# EAGLE board FY (EAGLE 9.6.2)
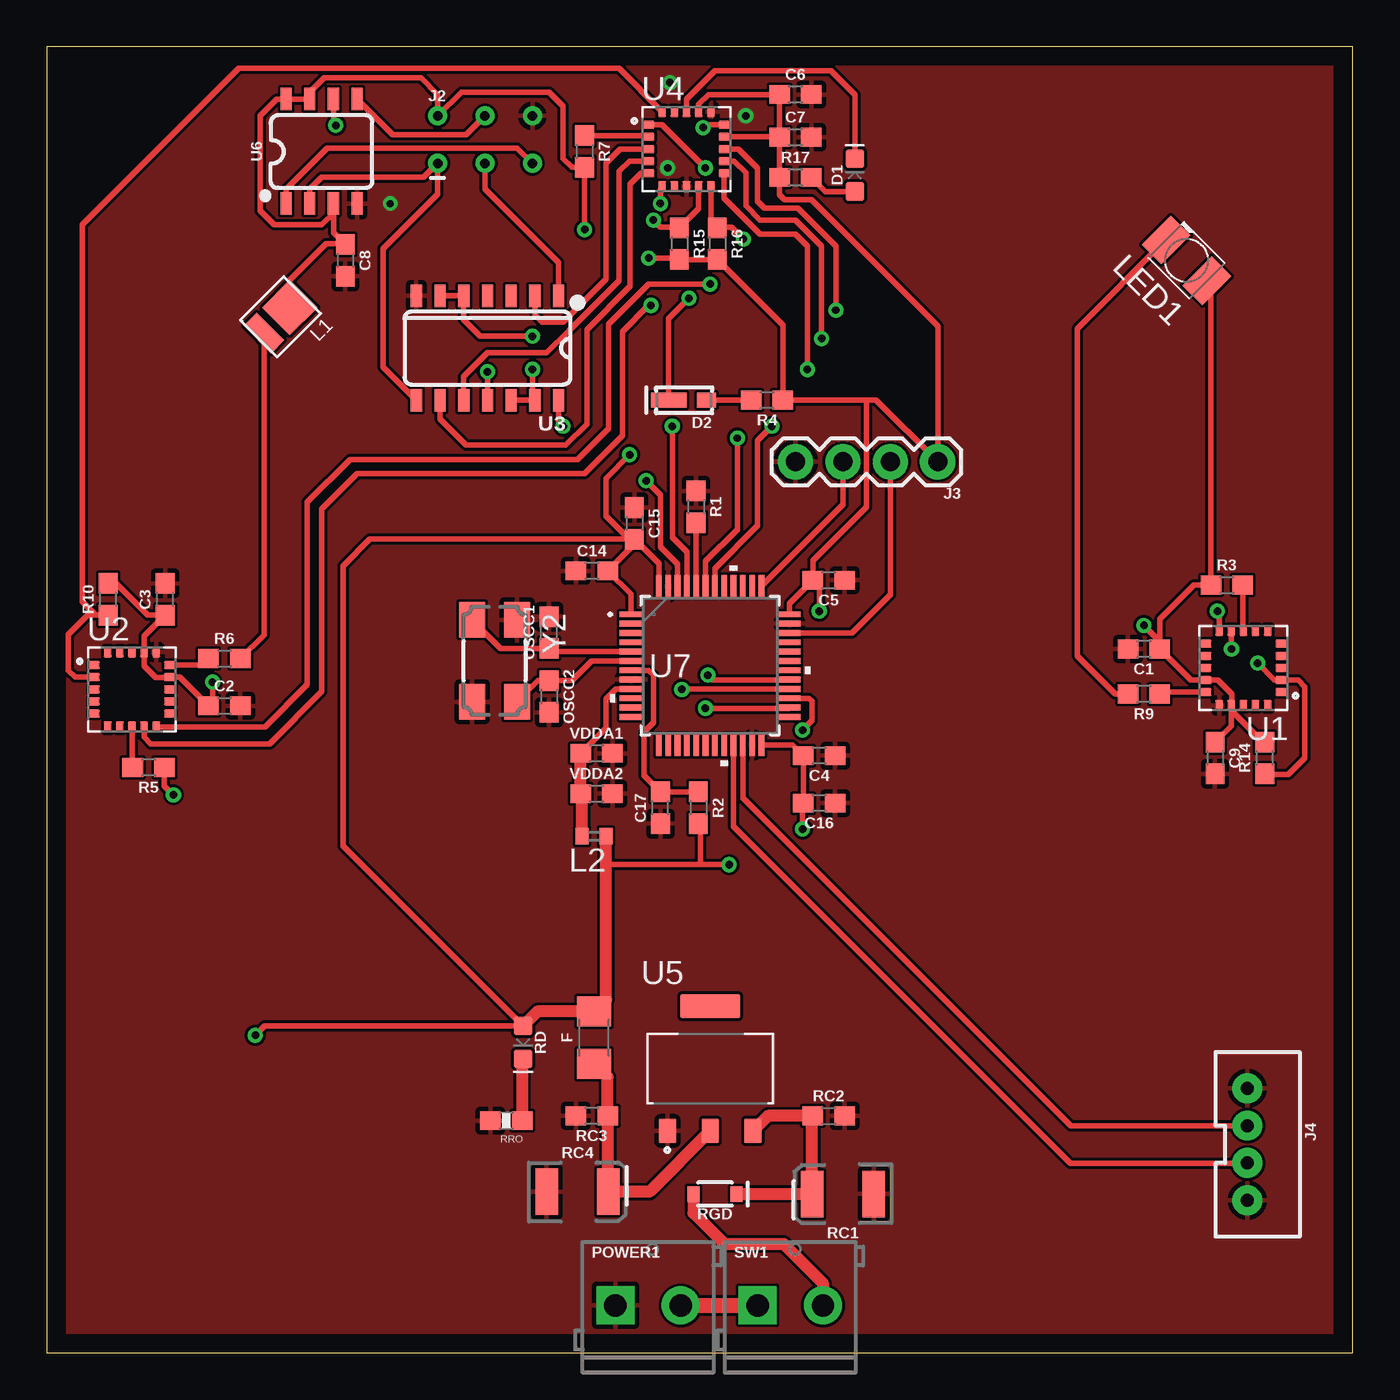
[diagram p0: board, top side]
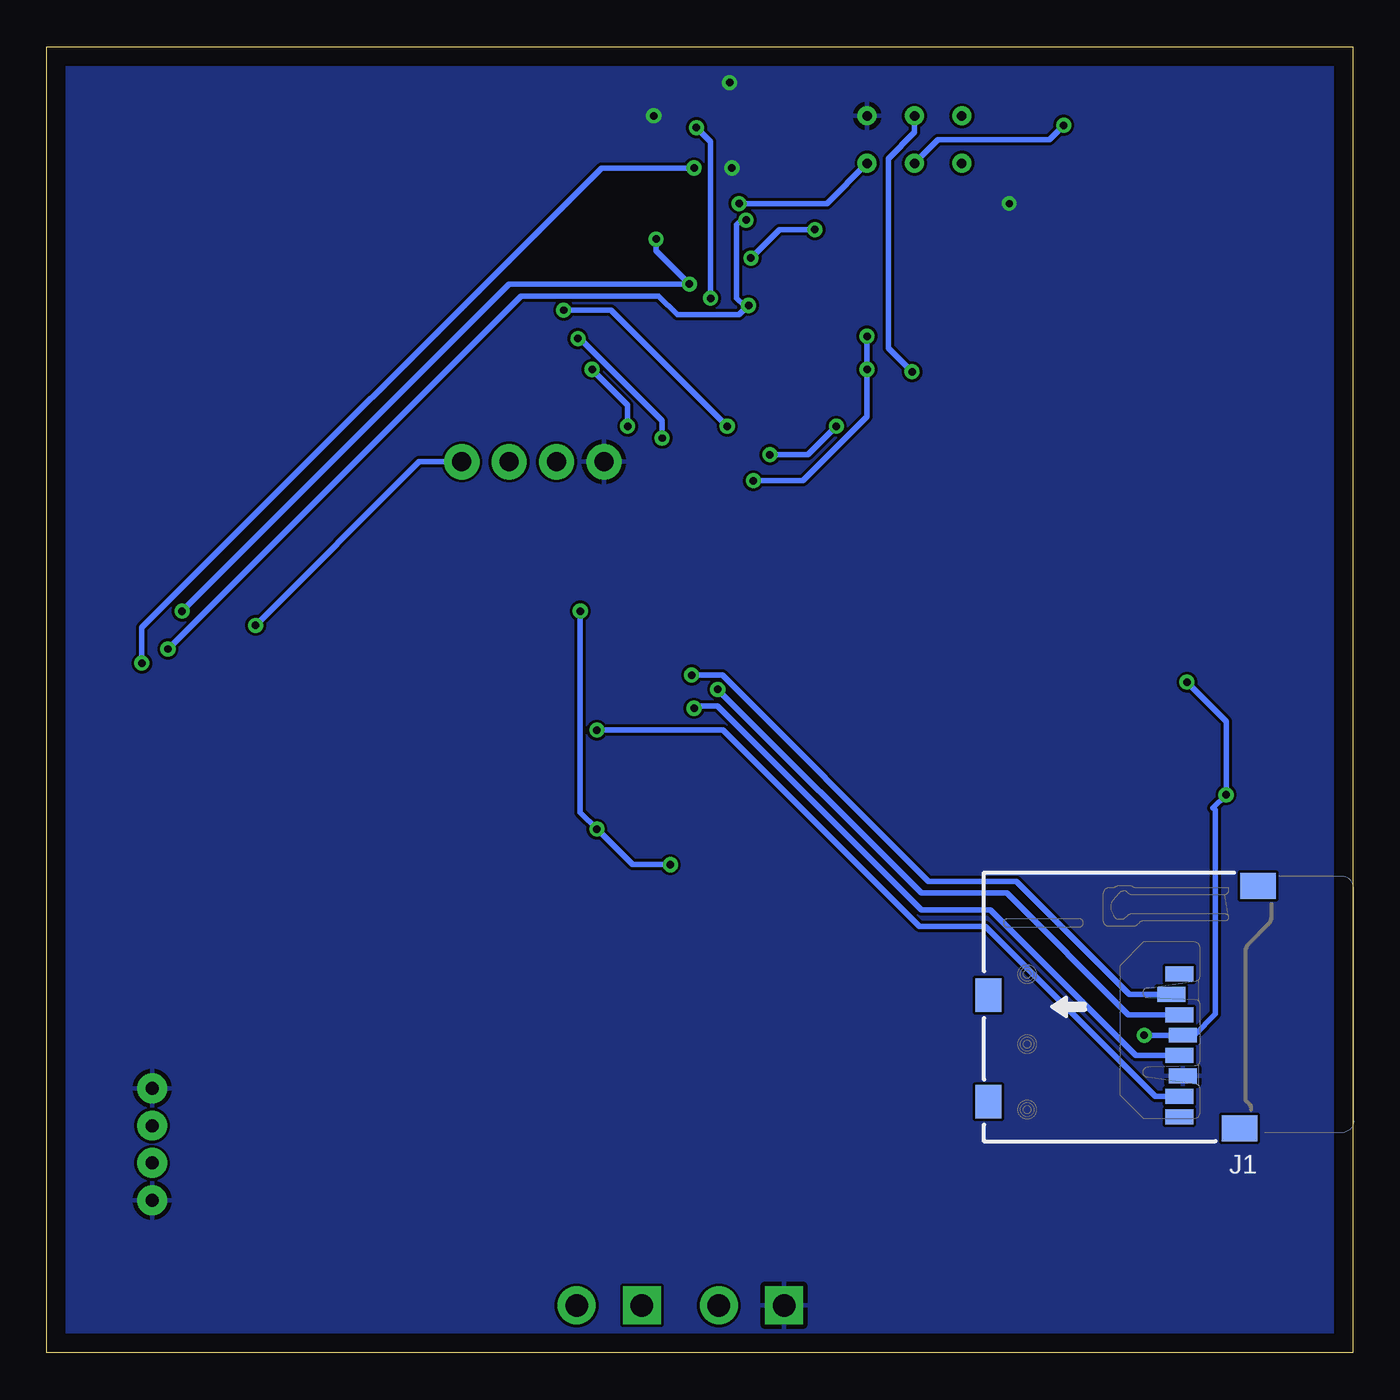
[diagram p1: board, bottom side, seen from below]

Size 70 x 70 mm. Coordinates in mm from the lower left corner, seen from the top.
Outline: 0,0 70,0 70,70 0,70 0,0
Copper layers (1*16): Top 0.035mm / dielectric 1.5mm / Bottom 0.035mm
Design rules "default": minimum track width 6mil, minimum drill 0.35mm, track to track 6mil, track to pad 6mil, pad to pad 6mil, via to via 6mil, smd to smd 6mil, copper to edge 40mil, drill to drill 6mil, minimum pad ring 10mil, minimum via ring 8mil, stop-mask expansion 4mil, vias tented up to drill 0mil, thermal gap 10mil
Net classes: 1 Power: width 0.305 mm

## Footprints (pad centres in the part's own frame; a part is rotated, then mirrored left to right if it is on the bottom)
0603 = smd 1.1 x 1: 1 -0.85,0; 2 0.85,0
LED-0603 = smd 1 x 1: A -0.877,0; C 0.877,0
SUPER_BRIGHT_SMD_LED_3014 = smd 1 x 0.8: A -1.2,0 | smd 1.9 x 0.8: C 0.827,0
1206 = smd 1.6 x 1.8: 1 -1.4,0; 2 1.4,0
CON-SD-CARD_2908-05 = smd 0.8 x 1.5: 1 1.761,3.847; 2 0.669,4.253; 3 -0.423,3.847; 4 -1.515,3.644; 5 -2.607,3.847; 6 -3.7,3.644; 7 -4.792,3.847; 8 -5.884,3.847 | smd 1.397 x 1.905: GND@1 -6.5,0.6; GND@2 6.473,-0.389 | smd 1.803 x 1.397: GND@3 0.631,14.059; GND@4 -5.084,14.059
2X3_TEST_POINTS = drill 0.508: 1 -2.54,-1.27; 2 -2.54,1.27; 3 0,-1.27; 4 0,1.27; 5 2.54,-1.27; 6 2.54,1.27
1X04 = drill 1.016 pad 1.88: 1 0,0; 2 2.54,0; 3 5.08,0; 4 7.62,0
JST-4-PTH-VERT = drill 0.7 pad 1.6: 1 -3,-0.55; 2 -1,-0.55; 3 1,-0.55; 4 3,-0.55
150283DS73103 = smd 2.1 x 2.1: 1 -1.95,-0.05 | smd 1 x 2.1: 2 -0.004,-0.06
0402 = smd 0.7 x 0.9: 1 -0.65,0; 2 0.65,0
KA-3528ASYC = smd 1.5 x 2.2: A -1.55,0; C 1.55,0
SCREWTERMINAL-3.5MM-2-NS = drill 1.2 pad 2.032 square: 1 0,0 | drill 1.2 pad 2.032: 2 3.5,0
EIA3528 = smd 1.2 x 2.5: A 1.65,0; C -1.65,0
SOD-323 = smd 0.63 x 0.83: A 1.15,0; C -1.15,0
0603-RES = smd 1.1 x 1: 1 -0.85,0; 2 0.85,0
PQFN65P470X450X270-20N = smd 0.59 x 0.43: 1 -2.01,1.3; 2 -2.01,0.65; 3 -2.01,0; 4 -2.01,-0.65; 5 -2.01,-1.3; 11 2.01,-1.3; 12 2.01,-0.65; 13 2.01,0; 14 2.01,0.65; 15 2.01,1.3 | smd 0.43 x 0.59: 6 -1.3,-2.01; 7 -0.65,-2.01; 8 0,-2.01; 9 0.65,-2.01; 10 1.3,-2.01; 16 1.3,2.01; 17 0.65,2.01; 18 0,2.01; 19 -0.65,2.01; 20 -1.3,2.01
SO14 = smd 0.6 x 1.2: 1 -3.175,-2.8; 2 -1.905,-2.8; 3 -0.635,-2.8; 4 0.635,-2.8; 5 1.905,-2.8; 6 3.175,-2.8; 7 4.445,-2.8; 8 4.445,2.8; 9 3.175,2.8; 10 1.905,2.8; 11 0.635,2.8; 12 -0.635,2.8; 13 -1.905,2.8; 14 -3.175,2.8
SOT229P700X180-4N = smd 0.93 x 1.31: 1 -2.29,-3.345; 2 0,-3.345; 3 2.29,-3.345 | smd 3.24 x 1.31: 4 0,3.345
SO08 = smd 0.6 x 1.2: 1 -1.905,-2.8; 2 -0.635,-2.8; 3 0.635,-2.8; 4 1.905,-2.8; 5 1.905,2.8; 6 0.635,2.8; 7 -0.635,2.8; 8 -1.905,2.8
LQFP48-7X7MM = smd 1.194 x 0.305: 1 -4.25,2.75; 2 -4.25,2.25; 3 -4.25,1.75; 4 -4.25,1.25; 5 -4.25,0.75; 6 -4.25,0.25; 7 -4.25,-0.25; 8 -4.25,-0.75; 9 -4.25,-1.25; 10 -4.25,-1.75; 11 -4.25,-2.25; 12 -4.25,-2.75; 25 4.25,-2.75; 26 4.25,-2.25; 27 4.25,-1.75; 28 4.25,-1.25; 29 4.25,-0.75; 30 4.25,-0.25; 31 4.25,0.25; 32 4.25,0.75; 33 4.25,1.25; 34 4.25,1.75; 35 4.25,2.25; 36 4.25,2.75 | smd 0.305 x 1.194: 13 -2.75,-4.25; 14 -2.25,-4.25; 15 -1.75,-4.25; 16 -1.25,-4.25; 17 -0.75,-4.25; 18 -0.25,-4.25; 19 0.25,-4.25; 20 0.75,-4.25; 21 1.25,-4.25; 22 1.75,-4.25; 23 2.25,-4.25; 24 2.75,-4.25; 37 2.75,4.25; 38 2.25,4.25; 39 1.75,4.25; 40 1.25,4.25; 41 0.75,4.25; 42 0.25,4.25; 43 -0.25,4.25; 44 -0.75,4.25; 45 -1.25,4.25; 46 -1.75,4.25; 47 -2.25,4.25; 48 -2.75,4.25
OSCCC500X320X110-4N = smd 1.9 x 1.4: 1 -2.2,-1.2; 2 2.2,-1.2; 3 2.2,1.2; 4 -2.2,1.2

## Placement (x,y rotation side)
C1  1uF  [0603]  58.8,37.72 180 top
C2  1uF  [0603]  9.53,34.67 0 top
C3  100nF  [0603]  6.35,40.39 90 top
C4  100nF  [0603]  41.4,32 180 top
C5  100nF  [0603]  41.91,41.4 180 top
C6  1uF  [0603]  40.13,67.44 0 top
C7  100nF  [0603]  40.13,65.15 0 top
C8  1.0uF  [0603]  16,58.55 270 top
C9  100nF  [0603]  62.61,31.88 270 top
C14  100nF  [0603]  29.21,41.91 0 top
C15  100nF  [0603]  31.5,44.45 270 top
C16  4.7uF  [0603]  41.4,29.46 180 top
C17  0.1uF  [0603]  32.89,29.21 90 top
D1  GREEN  [LED-0603]  43.31,63.12 90 top
D2  5700k  [SUPER_BRIGHT_SMD_LED_3014]  34.16,51.05 180 top
F  0.75A  [1206]  29.34,16.89 90 top
J1  CON-SD-CARD_MICROSD-2908-05  [CON-SD-CARD_2908-05]  5.46,18.54 90 bottom
J2  Flash Programming  [2X3_TEST_POINTS]  23.5,65.02 0 top
J3  [1X04]  47.75,47.75 180 top
J4  [JST-4-PTH-VERT]  64.9,11.18 270 top
L1  150283DS73103  [150283DS73103]  11.68,54.61 225 top
L2  BLM15HB221SN1  [0402]  29.34,27.69 180 top
LED1  [KA-3528ASYC]  61.09,58.55 135 top
OSCC1  25pF  [0603]  26.92,38.61 90 top
OSCC2  25pF  [0603]  26.92,35.18 270 top
POWER1  [SCREWTERMINAL-3.5MM-2-NS]  30.48,2.54 0 top
R1  10k  [0603]  34.8,45.34 270 top
R2  10k  [0603]  34.92,29.21 270 top
R3  10k  [0603]  63.25,41.15 0 top
R4  200  [0603]  38.61,51.05 180 top
R5  10k  [0603]  5.46,31.37 180 top
R6  200  [0603]  9.53,37.21 0 top
R7  10k  [0603]  28.83,64.39 270 top
R9  200  [0603]  58.8,35.31 180 top
R10  10k  [0603]  3.3,40.39 90 top
R14  10k  [0603]  65.28,31.88 90 top
R15  10k  [0603]  33.91,59.44 270 top
R16  10k  [0603]  35.94,59.44 270 top
R17  330  [0603]  40.13,62.99 0 top
RC1  22uF  [EIA3528]  42.67,8.51 180 top
RC2  100nF  [0603]  41.91,12.7 0 top
RC3  100nF  [0603]  29.21,12.7 180 top
RC4  22uF  [EIA3528]  28.45,8.64 0 top
RD  Red  [LED-0603]  25.53,16.64 270 top
RGD  1A/23V  [SOD-323]  35.81,8.51 180 top
RRO  1.5k  [0603-RES]  24.64,12.45 180 top
SW1  [SCREWTERMINAL-3.5MM-2-NS]  38.1,2.54 0 top
U1  AS72652-BLGT  [PQFN65P470X450X270-20N]  64.14,36.7 180 top
U2  AS72653-BLGT  [PQFN65P470X450X270-20N]  4.57,35.56 0 top
U3  74LVC4066  [SO14]  24.26,53.85 180 top
U4  AS72651-BLGT  [PQFN65P470X450X270-20N]  34.29,64.52 0 top
U5  AMS1117-3.3  [SOT229P700X180-4N]  35.56,15.24 0 top
U6  4MB Flash  [SO08]  14.73,64.39 0 top
U7  [LQFP48-7X7MM]  35.56,36.83 0 top
VDDA1  1uF  [0603]  29.46,32.13 0 top
VDDA2  100nF  [0603]  29.46,29.97 0 top
Y2  ABM2B-8.000MHZ-10-1-U-T  [OSCCC500X320X110-4N]  24,37.08 270 top

## Library data of the parts
C1 C2 C6 = SparkFun-Capacitors; PROD_ID: CAP-11015
C3 C7 C9 OSCC1 OSCC2 RC2 RC3 VDDA1 VDDA2 = SparkFun-Capacitors; PROD_ID: CAP-00810
C4 C5 C14-C17 = SparkFun-Capacitors; PROD_ID: CAP-07876
C8 = SparkFun-Capacitors; PROD_ID: CAP-00868
D1 = SparkFun-LED; PROD_ID: DIO-00821
D2 = SparkFun-LED; ORDER_URL: https://eu.mouser.com/ProductDetail/Lumileds/L130-5780HE1400001?qs=sGAEpiMZZMt82OzCyDsLFFsS4DDwXc38jMwK2doZZlk%3D; PROD_ID: DIO-13728
F = SparkFun-Fuses; PROD_ID: RES-11150
J1 = 52101-101-REV-A_v16
J2 = SparkFun-Connectors
J3 = SparkFun-Connectors; PROD_ID: CONN-09696
J4 = SparkFun-Connectors; PROD_ID: CONN-13251
L1 = USER-LED; ORDER_URL: https://eu.mouser.com/ProductDetail/Wurth-Elektronik/150283DS73103?qs=GedFDFLaBXFC8uVfOF%252Bhgw==
L2 = inductors; ORDER_URL: https://eu.mouser.com/ProductDetail/Murata-Electronics/NFZ15SR152SN10D?qs=rkhjVJ6%2F3EK7NITaH%252B9%252Bxg%3D%3D
LED1 = led; ORDER_URL: https://www.turus.com.tr/IR-Led-SMD-3528-875nM,PR-14481.html
POWER1 SW1 = SparkFun-Connectors; PROD_ID: CONN-08399
R1-R3 R5 = SparkFun-Resistors; PROD_ID: RES-12535
R4 R6 R7 R9 R10 R14-R17 = SparkFun-Resistors; PROD_ID: RES-00824
RC1 RC4 = SparkFun-Capacitors; PROD_ID: CAP-08063
RD = SparkFun-LED; PROD_ID: DIO-11154
RGD = SparkFun-DiscreteSemi; PROD_ID: DIO-11623
RRO = SparkFun-Resistors; PROD_ID: RES-08296
U1 U2 U4 = AS7265X-BLGT; AVAILABILITY: Warning; DESCRIPTION: AS72651-BLGT LGA20 LF T&RDP; MF: ams; MP: AS72651-BLGT; PACKAGE: LGA-20 ams; PRICE: None
U3 = SparkFun-IC-Logic; PROD_ID: IC-13944
U5 = AMS1117-3.3; AVAILABILITY: Unavailable; DESCRIPTION: Sot223/Pkg 1-Amp 3.3-Volt Low Drop Out Voltage Regulatator; MF: Advanced Monolithic Systems; MP: AMS1117-3.3; PACKAGE: SOT-89 ams; PRICE: None
U6 = SparkFun-IC-Memory; ORDER_URL: https://eu.mouser.com/ProductDetail/Adesto-Technologies/AT25SF041B-SHB-T?qs=wnTfsH77Xs7aj0PSgtTkzg%3D%3D; PROD_ID: IC-12455
U7 = STM32F303; BUILT_BY: EMA_UL_Team; COPYRIGHT: Copyright (C) 2018 Accelerated Designs. All rights reserved; MANUFACTURER_PART_NUMBER: STM32F303CCT6; SOURCELIBRARY: Updates_to_database_2020-10-19; VENDOR: STMicroelectronics
Y2 = ABM3B-26.000MHZ-10-1-U-T; AVAILABILITY: Good; DESCRIPTION: 26MHz ±10ppm Crystal 10pF 50 Ohms 4-SMD, No Lead; MF: Abracon; MP: ABM3B-26.000MHZ-10-1-U-T; PACKAGE: SMD-4 Abracon LLC; PRICE: None; PURCHASE-URL: https://pricing.snapeda.com/search/part/ABM3B-26.000MHZ-10-1-U-T/?ref=eda

## Nets
3.3V [Power]: C1.1 C2.1 C3.1 C4.2 C5.2 C6.1 C7.1 C8.1 C9.1 C14.2 C15.2 C16.2 F.2 J1.4 J2.2 J3.1 L1.1 L2.1 LED1.A R2.2 R3.1 R4.1 R5.1 R7.2 R10.2 R14.2 R15.2 R16.2 R17.1 RD.A U1.14 U1.17 U2.14 U2.17 U3.14 U4.14 U4.17 U6.3 U6.7 U6.8 U7.1 U7.24 U7.36 U7.48
BT0: R1.2 U7.44
CMISO: U3.9 U4.5
CMOSI: U3.10 U4.4
CS: J1.2 U7.29
CSCK: U3.2 U4.3
CSN_EE: J2.5 U4.6 U6.1
CTRLA: U3.5 U3.6 U3.12 U3.13 U7.46
FMISO: J2.1 U3.8 U6.2
FMOSI: J2.4 U3.11 U6.5
FSCK: J2.3 U3.1 U6.6
GND: C1.2 C2.2 C3.2 C4.1 C5.1 C6.2 C7.2 C8.2 C9.2 C14.1 C15.1 C16.1 C17.1 J1.6 J2.6 J3.4 J4.1 J4.4 OSCC1.2 OSCC2.2 POWER1.1 R1.1 RC1.C RC2.2 RC3.2 RC4.C RRO.2 U1.16 U2.16 U3.7 U4.8 U4.16 U5.1 U6.4 U7.8 U7.23 U7.35 U7.47 VDDA1.2 VDDA2.2 Y2.2 Y2.4
HT: U5.4
INT: U4.13 U7.45
LED_DRV: D2.C U4.15
LED_IND: D1.C U4.18
MISO: J1.7 U7.27
MOSI: J1.3 U7.28
N$1: R3.2 U1.8
N$2: R6.1 U2.15
N$3: POWER1.2 SW1.1
N$4: L1.2 R6.2
N$5: R5.2 U2.8
N$6: F.1 RC3.1 RC4.A U5.2
N$8: R9.1 U1.15
N$9: LED1.C R9.2
N$10: R7.1 U4.2
N$11: RD.C RRO.1
N$13: D2.A R4.2
N$14: D1.A R17.2
NRST: C17.2 R2.1 U7.7
OSC_IN: OSCC1.1 U7.5 Y2.1
OSC_OUT: OSCC2.1 U7.6 Y2.3
RX_S: U4.11 U7.42
RX_T: J4.3 U7.21
SCK: J1.5 U7.26
SCL_M: R15.1 U1.9 U2.9 U4.9
SDA_M: R16.1 U1.10 U2.10 U4.10
SLV1_R: R14.1 U1.2 U4.1
SLV2_R: R10.1 U2.2 U4.20
SWCLK: J3.3 U7.37
SWDIO: J3.2 U7.34
TX_S: U4.12 U7.43
TX_T: J4.2 U7.22
VDDA: L2.2 U7.9 VDDA1.1 VDDA2.1
VIN: RGD.A SW1.2
VNR: RC1.A RC2.1 RGD.C U5.3

## Tracks (layer width: path | path; a pad name or v marks a point on that pad's centre or on a via)
3.3V  (via drill 0.4)
  Top 0.305: U7.24 39.98,32.58 C4.2 C16.2 40.51,29.43 v40.51,28.07 | U7.36 39.81,40.15 C5.2 | U7.1 31.31,40.66 C14.2 31.5,43.35 C15.2 | U7.48 32.81,42.29 C15.2 | R10.2 3.72,41.24 5.42,39.54 C3.1 5.22,38.41 U2.17 5.22,36.81 5.84,36.2 6.84,36.2 6.86,36.21 | L1.1 13.03,57.48 14.99,59.44 15.96,59.44 | 15.96,59.44 C8.1 | 15.96,59.44 15.37,60.03 U6.3 15.37,61.09 14.73,60.45 12.19,60.45 11.43,61.21 11.43,66.3 12.32,67.19 U6.8 U6.7 14.1,67.56 14.86,68.32 20.07,68.32 20.95,67.44 J2.2 22.23,67.56 26.92,67.56 27.69,66.8 27.69,64.01 28.16,63.54 R7.2 v28.83,60.2 | R15.2 34.04,58.59 | 34.04,58.59 R16.2 39.46,55.07 R4.1 43.94,51.05 | U4.17 34.94,66.92 35.46,67.44 C6.1 C7.1 | U4.14 39.27,65.17 C7.1 | C7.1 R17.1 39.28,62.06 39.54,61.8 40.98,61.8 47.75,55.03 J3.1 44.45,51.05 43.94,51.05 | U2.14 6.86,36.21 | 6.86,36.21 7.14,36.21 C2.1 8.89,34.89 v8.89,35.94 | C5.2 41.06,42.46 43.94,45.34 43.94,51.05 | 29.99,26.16 35.05,26.16 | 35.05,26.16 v36.58,26.16 | v41.4,39.75 41.4,41.06 C5.2 | v6.79,29.91 6.31,30.39 R5.1 | v11.18,17.02 11.67,17.51 RD.A 15.88,27.17 15.88,42.16 17.31,43.6 C15.2 | C15.2 31.2,43.6 29.97,44.83 29.97,46.86 v31.24,48.13 | v27.69,49.66 27.43,49.91 U3.14 | 59.8,37.57 61.32,36.05 U1.14 62.75,36.05 63.5,35.31 63.5,34.71 U1.17 | 59.8,37.57 C1.1 59.65,39.33 61.47,41.15 R3.1 62.4,57.24 LED1.A | U1.17 63.48,33.6 C9.1 | R14.2 65.23,32.68 63.48,34.43 U1.17 | v58.8,38.99 59.8,37.99 59.8,37.57 | v32.26,58.67 33.95,58.67 34.04,58.59 | R2.2 35.05,28.23 35.05,26.16
  Top 0.635: RD.A 26.3,18.29 F.2 29.99,18.94 29.99,26.16 L2.1
  Bottom 0.305: v36.58,26.16 38.61,26.16 v40.51,28.07 41.4,28.96 v41.4,39.75 | v8.89,35.94 6.79,33.85 v6.79,29.91 7.49,29.21 7.37,29.08 7.37,18.16 8.5,17.03 J1.4 11.17,17.03 v11.18,17.02 | v31.24,48.13 29.21,48.13 v27.69,49.66 | J3.1 50.04,47.75 v58.8,38.99 | v28.83,60.2 30.73,60.2 v32.26,58.67
BT0
  Top 0.305: R1.2 34.81,44.48 U7.44
CMISO
  Top 0.305: U4.5 31.85,63.22 31.27,62.64 31.27,57.15 28.96,54.84 28.96,49.78 27.81,48.64 22.48,48.64 21.08,50.04 U3.9
CMOSI
  Top 0.305: U4.4 31.23,63.87 30.68,63.32 30.68,57.47 28,54.79 27.99,54.79 26.8,53.59 23.62,53.59 22.35,52.32 U3.10
CS  (via drill 0.4)
  Top 0.305: U7.29 39.8,36.07 35.69,36.07 v35.43,36.32
  Bottom 0.305: J1.2 11.97,19.21 18.03,25.27 22.73,25.27 33.78,36.32 v35.43,36.32
CSCK
  Top 0.305: U4.3 30.73,64.52 29.97,63.75 29.97,57.53 27.69,55.24 26.54,55.24 26.16,55.63 U3.2
CSN_EE  (via drill 0.4)
  Top 0.305: U6.1 12.83,62.36 15.04,64.57 25.22,64.57 J2.5 | U4.6 32.99,62.45 32.89,62.36 v32.89,61.59
  Bottom 0.305: J2.5 28.19,61.59 v32.89,61.59
CTRLA  (via drill 0.4)
  Top 0.305: U7.46 33.81,42.26 32.89,43.18 32.89,45.97 v32.13,46.74 | v26.04,52.7 26.04,51.17 U3.13 U3.12 | U3.6 U3.5 22.35,55.37 23.24,54.48 v26.04,54.48
  Bottom 0.305: v32.13,46.74 29.46,46.74 26.04,50.16 v26.04,52.7 v26.04,54.48
FMISO
  Top 0.305: U6.2 14.1,62.36 14.73,62.99 20.19,62.99 J2.1 20.95,62.1 18.03,59.18 18.03,52.83 U3.8
FMOSI  (via drill 0.4)
  Top 0.305: J2.4 22.48,65.28 18.55,65.28 U6.5 | v23.62,52.58 U3.11
  Bottom 0.305: J2.4 23.5,65.41 24.89,64.01 24.89,53.85 v23.62,52.58
FSCK  (via drill 0.4)
  Top 0.305: v15.49,65.79 15.37,65.91 U6.6 | J2.3 23.5,62.36 27.43,58.42 U3.1
  Bottom 0.305: J2.3 22.23,65.02 16.26,65.02 v15.49,65.79
GND  (via drill 0.38, 0.4)
  other vias: 33.4,68.07 37.47,66.29 33.27,63.5 18.41,61.59
  pour Top: -0.76,70.61 -0.76,-1.02 70.87,-1.02 70.87,70.61 67.82,70.61
  pour Bottom: -1.27,71.12 -1.27,-1.52 71.37,-1.52 71.37,71.12
INT  (via drill 0.4)
  Top 0.305: U7.45 34.31,42.91 33.53,43.69 33.53,48.64 33.53,49.02 v33.53,49.66 | U4.13 37.08,64.52 38.1,63.5 38.1,61.72 38.48,61.34 40.26,61.34 42.29,59.31 v42.29,55.88
  Bottom 0.305: v33.53,49.66 39.75,55.88 v42.29,55.88
LED_DRV  (via drill 0.4)
  Top 0.305: D2.C 33.34,55.43 v34.42,56.52 | v35.18,65.66 35.34,65.82 U4.15
  Bottom 0.305: v34.42,56.52 34.42,64.9 v35.18,65.66
LED_IND
  Top 0.305: U4.18 34.29,67.17 35.83,68.7 42.04,68.7 43.31,67.44 D1.C
MISO  (via drill 0.4)
  Top 0.305: U7.27 40.87,35.08 41.02,34.92 41.02,33.88 v40.51,33.37
  Bottom 0.305: v40.51,33.37 33.75,33.37 23.24,22.86 19.68,22.86 10.57,13.75 J1.7
MOSI  (via drill 0.4)
  Top 0.305: U7.28 34.06,35.58 v34.04,35.56
  Bottom 0.305: J1.3 12.02,18.12 18.54,24.64 23.11,24.64 v34.04,35.56
N$1
  Top 0.305: U1.8 64.1,38.75 R3.2
N$2
  Top 0.305: U2.15 8.32,36.86 R6.1
N$3
  Top 0.813: POWER1.2 SW1.1
N$4
  Top 0.305: L1.2 11.64,38.48 R6.2
N$5
  Top 0.305: U2.8 4.57,31.41 R5.2
N$6
  Top 0.635: U5.2 32.3,8.64 RC4.A 30.1,12.66 RC3.1 30.06,14.77 F.1
N$8
  Top 0.305: R9.1 59.75,35.4 U1.15
N$9
  Top 0.305: R9.2 57.28,35.31 55.24,37.34 55.24,54.9 LED1.C
N$10
  Top 0.305: U4.2 32.21,65.24 R7.1
N$11
  Top 0.635: RD.C 25.49,15.72 RRO.1
N$13
  Top 0.305: D2.A R4.2
N$14
  Top 0.305: R17.2 41.74,62.23 43.3,62.23 D1.A
NRST
  Top 0.305: U7.7 32.25,36.58 32.51,36.32 32.51,33.78 32,33.27 32,30.95 C17.2 R2.1
OSC_IN
  Top 0.305: U7.5 27.1,37.58 OSCC1.1 24.33,37.76 Y2.1
OSC_OUT
  Top 0.305: Y2.3 26.35,36.03 OSCC2.1 28.16,36.03 29.21,37.08 U7.6
RX_S  (via drill 0.4)
  Top 0.305: U7.42 35.81,42.03 38.1,44.32 38.1,48.9 v38.86,49.66 | U4.11 36.3,61.87 38.23,59.94 40.13,59.94 40.77,59.31 v40.77,52.7
  Bottom 0.305: v40.77,52.7 38.86,50.8 v38.86,49.66
RX_T
  Top 0.305: U7.21 36.81,28.21 54.86,10.16 64.33,10.16 J4.3
SCK  (via drill 0.4)
  Top 0.305: v35.31,34.54 39.77,34.54 U7.26
  Bottom 0.305: J1.5 11.62,15.93 19.43,23.75 23.11,23.75 34.04,34.67 35.18,34.67 v35.31,34.54
SCL_M  (via drill 0.4)
  Top 0.305: U4.9 34.94,61.32 R15.1 33.87,60.33 32.89,60.33 v32.51,60.71 | U2.9 5.22,33.01 5.59,32.64 11.94,32.64 14.73,35.43 14.73,45.21 16.64,47.12 28.83,47.12 30.86,49.15 30.86,54.74 32.26,56.13 v32.38,56.13 | v63.5,37.72 63.48,37.73 U1.9
  Bottom 0.305: v32.51,60.71 32.77,60.71 33.02,60.45 33.02,56.52 32.64,56.13 v32.38,56.13 32.89,55.63 36.2,55.63 37.21,56.64 44.58,56.64 v63.5,37.72
SDA_M  (via drill 0.4)
  Top 0.305: U4.10 35.59,60.64 R16.1 35.98,60.33 36.7,60.33 v37.34,59.69 | U2.10 11.71,33.55 13.97,35.81 13.97,45.59 16.26,47.88 28.45,47.88 30.1,49.53 30.1,55.12 32.26,57.28 v35.56,57.28 | v62.74,39.75 62.84,39.65 U1.10
  Bottom 0.305: v37.34,59.69 37.34,59.05 v35.56,57.28 45.21,57.28 v62.74,39.75
SLV1_R  (via drill 0.4)
  Top 0.305: U4.1 32.99,65.82 v35.31,63.5 | v64.9,36.96 65.8,36.05 U1.2 67.07,36.05 67.44,35.69 67.44,31.88 66.55,30.99 65.32,30.99 R14.1
  Bottom 0.305: v35.31,63.5 40.26,63.5 64.9,38.86 v64.9,36.96
SLV2_R
  Top 0.305: U2.2 1.53,36.21 1.17,36.58 1.17,38.51 2.2,39.54 R10.1 2.63,39.54 1.91,40.26 1.91,60.45 10.29,68.83 30.68,68.83 U4.20
SWCLK
  Top 0.305: U7.37 38.31,41.1 42.67,45.47 J3.3
SWDIO
  Top 0.305: U7.34 43.15,38.58 45.21,40.64 J3.2
TX_S  (via drill 0.4)
  Top 0.305: U7.43 35.31,42.42 37.01,44.12 v37.01,49.02 | U4.12 36.84,63.87 37.47,63.25 37.47,61.47 38.23,60.71 40.13,60.71 41.53,59.31 v41.53,54.36
  Bottom 0.305: v41.53,54.36 41.42,54.36 37.01,49.95 v37.01,49.02
TX_T
  Top 0.305: U7.22 37.31,29.75 54.88,12.18 J4.2
VDDA
  Top 0.305: U7.9 30.5,35.58 29.97,35.05 29.97,33.49 VDDA1.1
  Top 0.635: L2.2 28.69,29.9 VDDA2.1 VDDA1.1
VIN
  Top 0.635: RGD.A 34.66,7.5 36.32,5.84 39.5,5.84 41.6,3.74 SW1.2
VNR
  Top 0.635: RGD.C RC1.A 41.02,12.66 RC2.1 38.66,12.7 U5.3